# Altium PCB dAir-aster-0.0.0.1.PcbDoc
Units mm, origin at the board's own origin, x right, y up, seen from the top; angles counter-clockwise.
Board outline 94 x 94 mm, 2 copper layers (Top Layer, Bottom Layer); 83 components, 48 nets, 315 pads, 5 vias.
Unrouted connection lines stored in the file: 182.
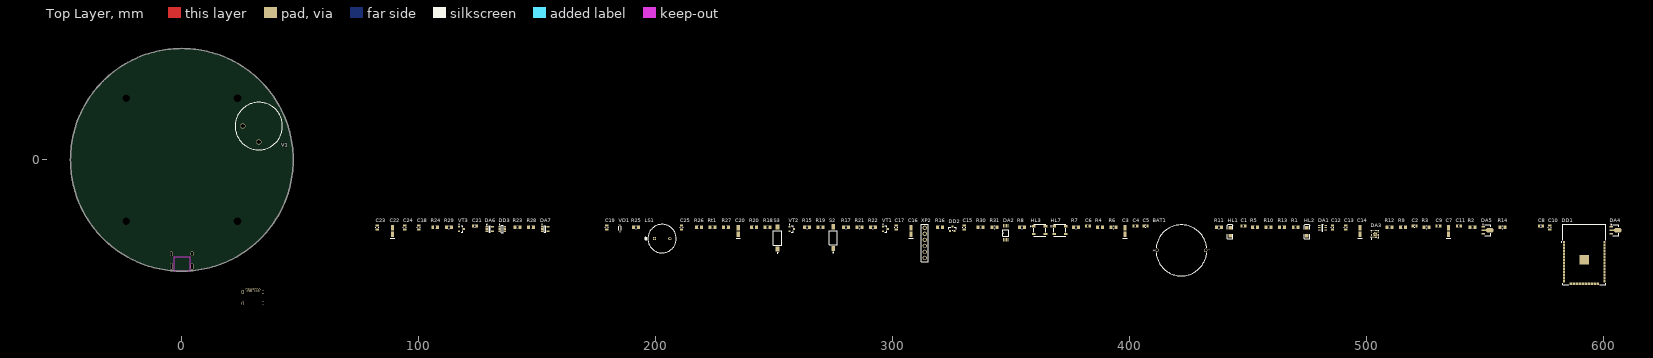
[diagram p0: Top Layer view]
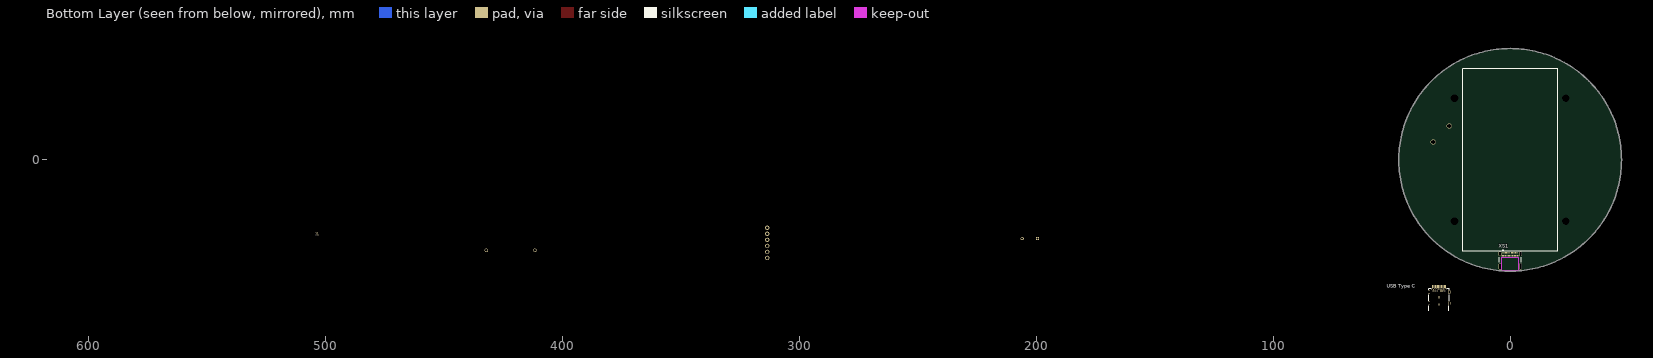
[diagram p1: Bottom Layer view, seen from below]

## Layer stack, top to bottom
Top Solder: solder mask 0.0102, Solder Resist, Dk 3.5
Top Layer: signal copper 0.0356
Dielectric 1: dielectric 0.32, FR-4, Dk 4.8
Bottom Layer: signal copper 0.0356
Bottom Solder: solder mask 0.0102, Solder Resist, Dk 3.5

## Board outline
-47,0 ccw(c0,0) 0,-47 ccw(c0,0) 47,0 ccw(c0,0) 0,47 ccw(c0,0)

## Design rules (kind name [scope] priority, off if disabled: settings)
Clearance [All] p1: gap=0.254 ignorepadtopadclearanceinfootprint=FALSE except(0: Arc-Hole Track-Hole SMDPad-Hole THPad-Hole Via-Hole Fill-Hole Poly-Hole Region-Hole Text-Hole)
PolygonConnect [All] p1: connectstyle=Relief reliefconductorwidth=0.254 reliefentries=4 polygonreliefangle="90 Angle" airgapwidth=0.254
RoutingVias [All] p1: holewidth=0.711 width=1.27 viastyle="Through Hole" minholewidth=0.711 minwidth=1.27 maxholewidth=0.711 maxwidth=1.27
SolderMaskExpansion [All] p1: expansion=0.102
Width [All] p1: maxlimit=0.254 minlimit=0.254 preferedwidth=0.254
30 further rules are at their usual default settings.

## Components (designator, comment, footprint, x,y, rotation, side; value= is the part's Value field where it differs from the comment)
BAT1 "3.7V" PANA-CR-2032HFN 421.93,-38.217 r0 top
C1 "100nF" CAPC0805(2012)155_L 448.092,-27.93 r0 top value=4.7uF
C2 "100nF" CAPC0805(2012)155_L 520.355,-27.93 r0 top value=4.7uF
C3 "47uF" KEMT-A-3216-18-2_M 398.181,-30.089 r90 top
C4 "4.7uF" CAPC0805(2012)155_L 402.499,-27.93 r0 top
C5 "1uF" CAPC0805(2012)155_L 406.817,-27.93 r0 top value=4.7uF
C6 "4.7uF" CAPC0805(2012)155_L 382.433,-27.93 r0 top
C7 "47uF" KEMT-A-3216-18-2_M 534.706,-30.089 r90 top
C8 "1uF" CAPC0805(2012)155_L 573.695,-27.93 r0 top value=4.7uF
C9 "1uF" CAPC0805(2012)155_L 530.388,-27.93 r0 top value=4.7uF
C10 "1uF" CAPC0805(2012)155_L 577.378,-28.565 r90 top value=4.7uF
C11 "1uF" CAPC0805(2012)155_L 539.024,-27.93 r0 top value=4.7uF
C12 "1nF" CAPC0805(2012)155_L 485.684,-28.565 r90 top value=4.7uF
C13 "0.1uF" CAPC0805(2012)155_L 491.272,-28.565 r90 top value=4.7uF
C14 "100uF" KEMT-A-3216-18-2_M 497.368,-30.089 r90 top
C15 "0.1uF" CAPC0805(2012)155_L 330.236,-28.565 r90 top value=4.7uF
C16 "0.1uF" KEMT-A-3216-18-2_M 307.757,-30.089 r90 top
C17 "0.1uF" CAPC0805(2012)155_L 301.534,-28.565 r90 top value=4.7uF
C18 "0.1uF" CAPC0805(2012)155_L 99.985,-28.565 r90 top value=4.7uF
C19 "1uF" CAPC0805(2012)155_L 179.36,-28.565 r90 top value=4.7uF
C20 "47uF" KEMT-A-3216-18-2_M 234.859,-30.089 r90 top
C21 "0.1uF" CAPC0805(2012)155_L 123.734,-27.93 r0 top value=4.7uF
C22 "10uF" KEMT-A-3216-18-2_M 88.936,-30.089 r90 top
C23 "0.1uF" CAPC0805(2012)155_L 82.459,-28.565 r90 top value=4.7uF
C24 "100 nF" CAPC0805(2012)155_L 94.143,-28.565 r90 top value=4.7uF
C25 "1mF" CAPC0805(2012)155_L 210.983,-28.565 r90 top value=4.7uF
DA1 "dw01v" dw01v 480.096,-27.676 r0 top
DA2 "fs8205" FS8205-TSSOP-8 346.873,-33.772 r90 top
DA3 "BQ24075" RGT0016C_V 503.591,-31.232 r90 top
DA4 "HT7530" SOT89_N 605.318,-29.708 r0 top
DA5 "HT7530" SOT89_N 551.216,-29.708 r0 top
DA6 "AD8603AUJ-REEL" ADI-UJ-5_M 129.957,-29.2 r0 top
DA7 "AD8603AUJ-REEL" ADI-UJ-5_M 153.325,-29.2 r0 top
DD1 "ESP-WROOM-32" OLMX-ESP-WROOM-32 591.983,-43.551 r0 top
DD2 "MAX809(SOT23)" FP-318-08-MFG 325.283,-29.073 r90 top
DD3 "MCP3421A2T-E/CH" SOT-23-CH6_L 135.291,-29.2 r0 top
HL1 "LED2" 3.2X1.6X1.1 442.504,-30.343 r90 top
HL2 "LED2" 3.2X1.6X1.1 474.889,-30.343 r90 top
HL3 "WS2812B" ADAI-WS2812B_V 362.113,-29.708 r0 top
HL7 "WS2812B" ADAI-WS2812B_V 370.622,-29.708 r0 top
LS1 "KPI1410(temporally)" CZCY-CY-12085G-5042-2_V 202.728,-33.264 r0 top
R1 "300" RESC0805(2012)_M 470.19,-28.438 r0 top value="4.30 Ohm"
R2 "5.1k" RESC0805(2012)_M 544.866,-28.438 r0 top value="4.30 Ohm"
R3 "56k" RESC0805(2012)_M 525.435,-28.438 r0 top value="4.30 Ohm"
R4 "1k" RESC0805(2012)_M 387.513,-28.438 r0 top value="4.30 Ohm"
R5 "1k" RESC0805(2012)_M 452.918,-28.438 r0 top value="4.30 Ohm"
R6 "1k" RESC0805(2012)_M 393.228,-28.438 r0 top value="4.30 Ohm"
R7 "1k" RESC0805(2012)_M 377.48,-28.438 r0 top value="4.30 Ohm"
R8 "1k" RESC0805(2012)_M 354.62,-28.438 r0 top value="4.30 Ohm"
R9 "0" RESC0805(2012)_M 515.402,-28.438 r0 top value="4.30 Ohm"
R10 "1k" RESC0805(2012)_M 458.76,-28.438 r0 top value="4.30 Ohm"
R11 "1k" RESC0805(2012)_M 437.805,-28.438 r0 top value="4.30 Ohm"
R12 "470k" RESC0805(2012)_M 509.687,-28.438 r0 top value="4.30 Ohm"
R13 "100k" RESC0805(2012)_M 464.475,-28.438 r0 top value="4.30 Ohm"
R14 "470" RESC0805(2012)_M 557.439,-28.438 r0 top value="4.30 Ohm"
R15 "10k" RESC0805(2012)_M 263.942,-28.438 r0 top value="4.30 Ohm"
R16 "10k" RESC0805(2012)_M 319.949,-28.438 r0 top value="4.30 Ohm"
R17 "10k" RESC0805(2012)_M 280.325,-28.438 r0 top value="4.30 Ohm"
R18 "10k" RESC0805(2012)_M 247.305,-28.438 r0 top value="4.30 Ohm"
R19 "470" RESC0805(2012)_M 269.657,-28.438 r0 top value="4.30 Ohm"
R20 "470" RESC0805(2012)_M 241.463,-28.438 r0 top value="4.30 Ohm"
R21 "47k" RESC0805(2012)_M 286.04,-28.438 r0 top value="4.30 Ohm"
R22 "47k" RESC0805(2012)_M 291.755,-28.438 r0 top value="4.30 Ohm"
R23 "1M" RESC0805(2012)_M 141.641,-28.438 r0 top value="4.30 Ohm"
R24 "150k" RESC0805(2012)_M 106.97,-28.438 r0 top value="4.30 Ohm"
R25 "200" RESC0805(2012)_M 191.679,-28.438 r0 top value="4.30 Ohm"
R26 "120k" RESC0805(2012)_M 218.222,-28.438 r0 top value="4.30 Ohm"
R27 "100k" RESC0805(2012)_M 229.779,-28.438 r0 top value="4.30 Ohm"
R28 "100" RESC0805(2012)_M 147.483,-28.438 r0 top value="4.30 Ohm"
R29 "470" RESC0805(2012)_M 112.812,-28.438 r0 top value="4.30 Ohm"
R30 "47k" RESC0805(2012)_M 337.221,-28.438 r0 top value="4.30 Ohm"
R31 "47k" RESC0805(2012)_M 343.063,-28.438 r0 top value="4.30 Ohm"
Rt1 "47k" RESC0805(2012)_M 224.064,-28.438 r0 top value="4.30 Ohm"
S2 "FSMSMTR" TECO-FSMSMTR_V 274.991,-32.883 r90 top
S3 "FSMSMTR" TECO-FSMSMTR_V 251.5,-33 r90 top
"USB Type C" "Comment" 632723300011 30,-59.35 r180 bottom
V1 "ME2 CO" "ME2 CO" 32.5,14.25 r0 top
VD1 "LL4148" INF-SOD323_V 184.948,-28.946 r0 top
VT1 "bc847" ONSC-SOT-23-3-318-08_V 296.962,-29.2 r0 top
VT2 "bc847" ONSC-SOT-23-3-318-08_V 257.465,-29.2 r0 top
VT3 "" ONSC-SOT-23-3-318-08_V 118.019,-29.2 r0 top
XP2 "bme680" BME280 313.599,-28.692 r0 top
XS1 "1054500101" FP-1054500101-MFG 0,-43 r180 bottom

## Footprints (in the part's own frame and the unit in brackets; to place one, negate y for a bottom-side part, rotate by r counter-clockwise, add the part's x,y. Pads: shape width x height; smd on the part's side, far side on the other; paste and mask are expansions set on the pad)
3.2X1.6X1.1 [mm] "SMT LED; 2 Flat Leads"
  rect 1.5x1.5 smd: 1(-1.75,0) 2(1.75,0)
  silkscreen extent -2.9,-1.15 3.2,1.15
632723300011 [mm] "USB 3.1 Type C Receptacle Horizontal THR"
  rect 0.3x1.2 smd: A1(-2.75,5.93) A2(-2.25,5.93) A3(-1.75,5.93) A4(-1.25,5.93) A5(-0.75,5.93) A6(-0.25,5.93) A7(0.25,5.93) A8(0.75,5.93) A9(1.25,5.93) A10(1.75,5.93) A11(2.25,5.93) A12(2.75,5.93)
  round 0.65 hole 0.4: B1(2.8,4.68) B2(2.4,3.98) B3(1.6,3.98) B4(1.2,4.68) B5(0.8,3.98) B6(0.4,4.68) B7(-0.4,4.68) B8(-0.8,3.98) B9(-1.2,4.68) B10(-1.6,3.98) B11(-2.4,3.98) B12(-2.8,4.68) G1(2,4.68) G2(-2,4.68)
  oval 1x1.6 hole 0.6 slot 1.2 at 90 deg: Shell(-4.27,-1.2) Shell(-4.27,3.53) Shell(4.27,-1.2) Shell(4.27,3.53)
  rect 0.2x1 smd: Shell(0,-1.75) Shell(0,1.35)
  silkscreen extent -4.37,-4.45 4.34,5, body extent -4.37,-5.6 4.37,6.19, height 3.05
ADAI-WS2812B_V [mm] "SMD, 4-Leads, Body 5x5mm, Pitch 3.3mm"
  rect 1.5x0.9 smd: 1(-2.45,1.65) 2(-2.45,-1.65) 3(2.45,-1.65) 4(2.45,1.65)
  silkscreen extent -3.87,-2.5 2.5,2.5, body extent -2.7,-2.5 2.7,2.5, height 1.69
ADI-UJ-5_M [mm] "SOT23, 5-Leads, Body 2.9x1.6mm, Pitch 0.95mm, IPC Low Density"
  rect 1.15x0.7 smd: 1(-1.225,0.95) 2(-1.225,0) 3(-1.225,-0.95) 4(1.225,-0.95) 5(1.225,0.95)
  silkscreen extent -1.35,-1.45 0.25,1.97, body extent -0.8,-1.45 0.8,1.45, height 1
BME280 [mm]
  round 1.8 hole 1.2: 1(0,0) 2(0,-2.54) 3(0,-5.08) 4(0,-7.62) 5(0,-10.16) 6(0,-12.7)
  silkscreen extent -1.5,-14.25 1.5,1.5
CAPC0805(2012)155_L [mm] "Chip Capacitor, Body 2.0x1.2mm, Height 1.55mm, IPC High Density"
  rect 0.95x1.35 smd: 1(-0.8,0) 2(0.8,0)
  silkscreen extent -0.05,-0.58 0.05,0.58, body extent -1.1,-0.72 1.1,0.72, height 1.55
CZCY-CY-12085G-5042-2_V [mm] "Through-hole Buzzer, 2-Leads, Dia 12mm, Height 8.5mm"
  rect 1.35x1.35 hole 0.85: 1(-3.25,0)
  round 1.35 hole 0.85: 2(3.25,0)
  Mechanical 13 keep-out circle w0.1: c0,0 r6
  silkscreen extent -7.41,-6 6,6, body extent -6,-6 6,6, height 8.5
dw01v [mm]
  rect 1x0.5 smd: 1(0,0)
  oval 1x0.5 smd: 2(0,-0.95) 3(0,-1.9) 4(2.8,-1.9) 5(2.8,-0.95) 6(2.8,0)
  silkscreen extent 1.16,-2.38 1.64,0.48
FP-318-08-MFG [mm]
  rect 0.9x0.8 smd paste+0 mask+0: 1(-1,0.95) 2(-1,-0.95) 3(1,0)
  silkscreen extent -0.7,-1.52 0.7,1.52, body extent -1.55,-1.62 1.55,1.62, height 0.25
FP-1054500101-MFG [mm]
  rrect100% 1.1x2.1 hole 1.6 slot 0.6 at 0 deg paste-1000 mask+0: 1(-4.32,3.36) 2(4.32,3.36)
  rrect100% 1.1x2.6 hole 2.1 slot 0.6 at 0 deg paste-1000 mask+0: 3(-4.32,-2) 4(4.32,-2)
  rect 0.3x0.7 smd paste+0 mask+0: A1(-3,3.77) A2(-2.5,3.77) A3(-2,3.77) A4(-1.5,3.77) A5(-1,3.77) A6(-0.5,3.77) A7(0.5,3.77) A8(1,3.77) A9(1.5,3.77) A10(2,3.77) A11(2.5,3.77) A12(3,3.77) B2(2.25,2.47) B3(1.75,2.47) B4(1.25,2.47) B5(0.75,2.47) B6(0.25,2.47) B7(-0.25,2.47) B8(-0.75,2.47) B9(-1.25,2.47) B10(-1.75,2.47) B11(-2.25,2.47)
  rect 1x0.7 smd paste+0 mask+0: B1(3.1,2.47) B12(-3.1,2.47)
  Keep-Out Layer region: -3.5,1.88 3.5,1.88 3.5,-3.77 -3.5,-3.77
  silkscreen extent -4.57,-0.3 4.57,5.03
FS8205-TSSOP-8 [mm]
  rect 1.45x0.45 smd: 1(0,0)
  oval 1.45x0.45 smd: 2(0,-0.65) 3(0,-1.3) 4(0,-1.95) 5(5.9,-1.95) 6(5.9,-1.3) 7(5.9,-0.65) 8(5.9,0)
  silkscreen extent 1.56,-2.28 4.34,0.33
INF-SOD323_V [mm] "SOD, 2-Leads, Body 1.7x1.25 mm"
  rect 0.6x0.8 smd: 1(0,1.25) 2(0,-1.25)
  silkscreen extent -0.76,-0.85 0.6,1.83, body extent -0.63,-0.85 0.63,0.85, height 1.1
KEMT-A-3216-18-2_M [mm] "Molded TAN Capacitor, 2-Leads, Body 3.4x1.8mm, IPC Low Density"
  rect 2.35x1.35 smd: 1(-1.325,0) 2(1.325,0)
  silkscreen extent -3,-0.9 -3,0.9, body extent -1.7,-0.9 1.7,0.9, height 1.8
"ME2 CO" [mm]
  round 2.2 hole 1.8: 1(-6.75,0) 2(0,-6.75)
  silkscreen extent -10,-10 10,10
OLMX-ESP-WROOM-32 [mm] "SMD, 38-Leads, Body 18x25.5mm, Pitch 1.27mm"
  rect 0.95x1 smd: 1(-8.575,8.78) 2(-8.575,7.51) 3(-8.575,6.24) 4(-8.575,4.97) 5(-8.575,3.7) 6(-8.575,2.43) 7(-8.575,1.16) 8(-8.575,-0.11) 9(-8.575,-1.38) 10(-8.575,-2.65) 11(-8.575,-3.92) 12(-8.575,-5.19) 13(-8.575,-6.46) 14(-8.575,-7.73) 17(-3.175,-8.78) 25(8.575,-7.73) 26(8.575,-6.46) 27(8.575,-5.19) 28(8.575,-3.92) 29(8.575,-2.65) 30(8.575,-1.38) 31(8.575,-0.11) 32(8.575,1.16) 33(8.575,2.43) 34(8.575,3.7) 35(8.575,4.97) 36(8.575,6.24) 37(8.575,7.51) 38(8.575,8.78)
  rect 4x4 smd: 1(0,1.395)
  rect 1x0.95 smd: 15(-5.715,-8.78) 16(-4.445,-8.78) 18(-1.905,-8.78) 19(-0.635,-8.78) 20(0.635,-8.78) 21(1.905,-8.78) 22(3.175,-8.78) 23(4.445,-8.78) 24(5.715,-8.78)
  silkscreen extent -9.72,-9.23 9,16.27, body extent -9.04,-9.25 9.04,16.29, height 3.04
ONSC-SOT-23-3-318-08_V [mm] "SOT23, 3-Leads, Body 2.92x1.3mm, Pitch 0.95mm"
  rect 0.9x0.8 smd: 1(-1,0.95) 2(-1,-0.95) 3(1,0)
  silkscreen extent -1.12,-1.46 0.65,2.02, body extent -0.65,-1.46 0.65,1.46, height 1.11
PANA-CR-2032HFN [mm] "TH, 2-Leads, Dia 21.5mm"
  round 1.45 hole 1.1: 1(-10.25,0) 2(10.25,0)
  silkscreen extent -10.7,-10.75 10.7,10.75, body extent -10.75,-10.75 10.75,10.75, height 9.9
RESC0805(2012)_M [mm] "Chip Resistor, Body 2.0x1.3mm, IPC Low Density"
  rect 1.25x1.5 smd: 1(-1.05,0) 2(1.05,0)
  silkscreen extent -0.05,-0.65 0.05,0.65, body extent -1.1,-0.67 1.1,0.67, height 0.7
RGT0016C_V [mm] "QFN, 16-Leads, Body 3x3mm, Pitch 0.5mm, Thermal Pad 1.65x1.65mm"
  rrect40% 0.6x0.25 smd: 1(-1.4,0.75) 2(-1.4,0.25) 3(-1.4,-0.25) 4(-1.4,-0.75) 9(1.4,-0.75) 10(1.4,-0.25) 11(1.4,0.25) 12(1.4,0.75)
  rrect40% 0.25x0.6 smd: 5(-0.75,-1.4) 6(-0.25,-1.4) 7(0.25,-1.4) 8(0.75,-1.4) 13(0.75,1.4) 14(0.25,1.4) 15(-0.25,1.4) 16(-0.75,1.4)
  rrect6% 1.55x1.55 on Top Paste: 17(0,0)
  rrect6% 1.7x1.7 smd paste-0.85: 17(0,0)
  silkscreen extent -2.35,-1.57 1.57,1.58, body extent -1.5,-1.5 1.5,1.5, height 1
SOT89_N [mm] "SOT89, 3-Leads, Body 4.5x2.4 mm, Pitch 1.5mm, Lead Span 4.1mm, IPC Medium Density"
  rect 1.4x0.6 smd: 1(-1.9,1.5) 3(-1.9,-1.5)
  rect 1.8x0.6 smd: 2(-1.7,0)
  oct 3.2x1.9 smd: 2(0.8,0)
  silkscreen extent -2.07,-2.3 1.3,2.47, body extent -1.3,-2.3 1.29,2.3, height 1.6
SOT-23-CH6_L [mm] "SOT23, 6-Leads, Body 2.9x1.7mm, Pitch 0.95mm, Lead Span 2.8mm, IPC High Density"
  rect 0.9x0.65 smd: 1(-1.2,0.95) 2(-1.2,0) 3(-1.2,-0.95) 4(1.2,-0.95) 5(1.2,0) 6(1.2,0.95)
  silkscreen extent -1.32,-1.55 0.35,1.95, body extent -0.9,-1.55 0.9,1.55, height 1.45
TECO-FSMSMTR_V [mm] "SMD, 2-Leads, Body 6x3.5mm, Pitch 9.19mm"
  rect 2.2x1.6 smd: 1(-4.595,0)
  rect 2.18x1.6 smd: 2(4.595,0)
  silkscreen extent -6.37,-1.75 3,1.75, body extent -4.98,-1.75 4.98,1.75, height 4.4

## Part data
BAT1: library part CMP-2000-05296-1, "Coin Cell Battery, 225 mAh, 0.2 mA, 3 V, -30 to 60 degC, Bulk", Battery Capacity=220mAh, Battery Voltage=3V, Manufacturer=Panasonic, Battery IEC Code=CR2032, Battery NEDA Code=5004LC, Battery Size Code=2032, Battery Technology=LithiumManganeseDioxide, Battery Terminals=PCBPins, Datasheet URL=https://datasheet.ciiva.com/3/aaa4000de87-3072.pdf, Datasheet Version="Rev. 0, 05/2010", External Depth=-, External Diameter=20mm, External Height=3.2mm, External Width=-, Manufacturer URL=http://www.panasonic.com/, Product Range=-, SVHC=1,2-dimethoxyethane,ethyleneglycoldimethylether(EGDME)(15-Jun-2015), Weight=2.9g
C1 C2 C4 C5 C6 C8 C9 C10 C11 C12 C13 C15 C17 C18 C19 C21 C23: library part CMP-1036-04882-1, "CAP 4.7uF 10V ±10% 0805 (2012 Metric) Thickness 1.55mm SMD", Case-EIA=0805, Case-Metric=2012, Rated Voltage="10 V", Tolerance=A±10%, Max Thickness="1.55 mm", Technology=SMT
C3 C7 C14 C16 C20 C22: library part CMP-2000-05172-1, Capacitance=10µF, ESR (Equivalent Series Resistance)=3.8Ohm, Lifetime @ Temp.=2000Hrs@85degC, Manufacturer=Kemet, Manufacturer Size Code=A, Operating Temperature=-55degC~125degC, Package / Case=1206(3216Metric), Package Description="2-Pin Surface Mount Device, Body 3.2 x 1.6 mm", Package Reference=1206, Standard Package=2,000, Tolerance=±10%, Voltage - Rated=10V, Catalog Drawings=T49x,T5xxSeries_A-side1T49x,T5xxSeries_A,B-side2T49x,T5xxSeries_A,SBottom, Category=Capacitors, Datasheet URL=http://www.farnell.com/datasheets/1824869.pdf, Datasheet Version=Apr-14, Family=TantalumCapacitors, Features=GeneralPurpose, Height - Seated (Max)="0.071\"(1.80mm)", Lead Spacing=-, Manufacturer URL=http://www.kemet.com/, Mounting Type=SurfaceMount, Online Catalog=T491Series, Other Names=399-3684-2, Packaging=Tape&Reel(TR), Product Training Modules=CapacitorBasics-TypicalUsesforCapacitorsDeratingGuidelinesforSurfaceMountTantalumCapacitors, Series=T491, Size / Dimension="0.126\"Lx0.063\"W(3.20mmx1.60mm)", Type=Molded
C24 C25: library part CMP-1036-04882-1, "CAP 4.7uF 10V ±10% 0805 (2012  Thickness 1.55mm SMD", Case-EIA=0805, Case-Metric=2012, Rated Voltage="10 V", Tolerance=A±10%, Max Thickness="1.55 mm", Technology=SMT
DA3: library part CMP-0321-00238-2, "USB-Friendly Li-Ion Battery Charger and Power-Path Management IC, Vout 5.5 V, 4.3 V, -40 to 85 degC, 16-pin QFN (RGT), Green (RoHS & no Sb/Br)", Manufacturer="Texas Instruments", Over Voltage Protection=N, PartNumber=BQ24075RGTR, Code_JEDEC=MO-220, ComponentLink1Description=Datasheet, ComponentLink1URL=http://www.ti.com/general/docs/lit/getliterature.tsp?genericPartNumber=BQ24075&fileType=pdf, DatasheetVersion=SLUS810G, Eco-Plan="Green (RoHS & no Sb/Br)", Lead Acid=N, Li-Ion=N, Li-Polymer=N, Mounting Technology="Surface Mount", NiCd=N, NiMH=N, PackageDescription="16-Pin Plastic Quad Flat No-Lead, 3 x 3 mm Body, 0.5 mm Pitch, 1.7 x 1.7 mm Exposed Pad", PackageReference=RGT0016C, PackageVersion="revH, Oct-2011", SubFamily="Battery Charge Management", Vin(Min)(V)=4.3
DA4 DA5: library part CMP-0204-00106-1, "100mA Low Power LDO, Output Voltage 3.0V, SOT89 Pkg", Code_IPC=SOT89, DatasheetVersion="Rev1.80, Mar-2010", PackageDescription="3-Pin SOT-89 Package 1.5 mm Pitch, 4.1 mm Lead Span", PackageReference=SOT89, PackageVersion=May-2010
DA6 DA7: library part CMP-0384-02070-2, "Single Channel Single-Supply Operation Operational Amplifier, 400 KHz BW, 100 mV/us SR, Industrial, 5-pin SOT23 (UJ-5), Reel", Amplifiers Per Package=1, Generic Part Number=AD8603, Input Bias Current=200fA, Input Offset Voltage=12uV, Manufacturer="Analog Devices", Code_JEDEC=MO-193-AB, ComponentLink1Description="Manufacturer URL", ComponentLink1URL=http://www.analog.com/en/index.html, ComponentLink2Description=Datasheet, ComponentLink2URL=http://www.analog.com/static/imported-files/data_sheets/AD8603_8607_8609.pdf, ComponentLink3Description="Package Specification", ComponentLink3URL=http:/www.analog.com/static/imported-files/packages/PKG_PDF/TSOT(UJ)/UJ_5.pdf, ComponentLink4Description="Reference Circuit", ComponentLink4URL=http://www.analog.com/en/all-operational-amplifiers-op-amps/operational-amplifiers-op-amps/ad8603/products/product.html#product-recommendations, DatasheetVersion="Rev. C", Iq/Amp=50uA, Mounting Technology="Surface Mount", PackageDescription="5-Pin Thin Small Outline Transistor Package, Body 2.9 x 1.6 mm, Pitch 0.95 mm", PackageReference=UJ-5, PackageVersion=100708-A, PartNumber=AD8603AUJ-REEL, RevisionNote="Reference Circuit URL fixed", Slew Rate=100mV/us, Small Signal Bandwidth=400KHz, V Span Max=6V, V Span Min=1.8V
DD1: library part CMP-2000-07454-1, "Espressif System, 2.7 to 3.6 V, -40 to 85 degC, 38-Pin SMD", Manufacturer=Olimex, Package Description="38-Pin Surface Mount Device, Body 18 x 25.5 mm, Pitch 1.27 mm", Datasheet URL=http://www.espressif.com/sites/default/files/documentation/esp-wroom-32_datasheet_en.pdf, Datasheet Version="Rev. 2.1, 09/2017", Manufacturer URL=https://www.olimex.com, Mounting Technology=SurfaceMount, Package Reference=ESP-WROOM-32, RoHSCompliant=false
DD2: library part CMP-07130-000007-1, "IC MPU SUPERVISORY 2.93V SOT23", Manufacturer="ON SEMICONDUCTOR", Manufacturer Part Number=MAX809STRG, Max Junction Temp=+125°C, Max Supply Voltage=5.5V, Min Supply Voltage=1V, Nominal Supply Current=0.5-0.8uA, Output Current=20mA, Output Voltage=0.3V, Package=318-08, Temperature="-40°C to +125°C", Temperature Range Low=-40°C, Threshold Voltage=2.93V, Automotive=No, Category=IC, ComponentLink2Description=Datasheet, ComponentLink2URL=https://www.onsemi.cn/PowerSolutions/document/MAX809S-D.PDF, Device Class L1="Integrated Circuits (ICs)", Device Class L2="Power Management ICs", Device Class L3="Voltage Supervisors", Digikey Description="IC MPU SUPERVISORY 2.93V SOT23", Footprint Url=https://www.onsemi.com/pub/Collateral/318-08.PDF, Height=1.11mm, Lead Free=Yes, Mouser Description="Supervisory Circuits 2.93V uP Reset", Number Of Outputs=1, Number Of Rails Monitored=1, Octopart=https://octopart.com/max809strg-on+semiconductor-509853, Reset Timeout=10us, Reset Type="Active Low", RoHS=TRUE, Standoff Height=0.01mm, Temperature Range High=+125°C
DD3: library part CMP-0188-00097-2, "18-Bit Analog-to-Digital Converter with I2C Interface and On-Board Reference, 6-Pin SOT-23, Extended Temperature, Tape and Reel", Code_IPC=SOT26A-6, ComponentLink1Description="Manufacturer URL", ComponentLink1URL=http://www.microchip.com/, ComponentLink2Description=Datasheet, ComponentLink2URL=http://ww1.microchip.com/downloads/en/DeviceDoc/22003e.pdf, ComponentLink3Description="Package Specification", ComponentLink3URL=http://www.microchip.com/stellent/groups/techpub_sg/documents/packagingspec/en012702.pdf, DatasheetVersion="revE, Aug-2009", PackageDescription="6-Lead Plastic Small Outline Transistor (CH) [SOT-23]", PackageReference=SOT-23-CH6, PackageVersion="revBB, Aug-2009", RevisionNote="URLs added."
HL1 HL2: "Typical RED, GREEN, YELLOW, AMBER GaAs LED", LatestRevisionDate=17-Jul-2002, LatestRevisionNote="Re-released for DXP Platform.", PackageDescription="SM LED; 2 Flat Leads", PackageReference=3.2X1.6X1.1, PackageVersion=Feb-2002, Published=8-Jun-2000, Publisher="Altium Limited"
HL3 HL7: library part CMP-1740-00005-1, "Intelligent Control LED Integrated Light Source, 3.5 to 5.3 V, -25 to 80 degC, 4-Pin SMD, RoHS, Bulk", Case\Package=Radial, Current Rating="240 mA", Max Operating Temperature="125 degC", Min Operating Temperature="-55 degC", Package Quantity=200, Tolerance=10%, ComponentLink1Description="Manufacturer URL", ComponentLink1URL=https://www.adafruit.com/, ComponentLink2Description=Datasheet, ComponentLink2URL=https://cdn-shop.adafruit.com/datasheets/WS2812B.pdf, DatasheetVersion=May-13, Height="12.2 mm", Lead Pitch="5 mm", Length="12.2 mm", Mount="Through Hole", PackageDescription="4-Pin Surface Mount Device, Body 5 x 5 mm, Pitch 3.3 mm", PackageReference=WS2812B, Packaging=Bulk, Pins=2, Radiation Hardening=No, REACH SVHC="No SVHC", RoHSCompliant=true, Shielding=Unshielded
LS1: library part CMP-1019-00001-1, "Buzzer, 5 V, 42 Ohm, -20 to 70 degC, 2-Pin THD, Dia 12 mm, Height 8.5 mm, RoHS, Tray", Current Consumption (Max.)="35 mA", Manufacturer="Changzhou Chaoyin", Operating Temperature Range="-20 to 70 degC", Oscillation Frequency="2.048 KHz", PartNumber=cy-12085G-5042, Rated Voltage="5 V", Resistance Value="42 +/- 4 Ohm", Mounting Technology="Through Hole", PackageDescription="2-Pin Through-hole Buzzer, Dia 12 mm, Height 8.5 mm", PackageReference=CY-12085G-5042, Packing=Tray, RoHS=TRUE, Sound Pressure Level (Min.)="85 dB"
R1 R2 R3 R4 R5 R6 R7 R8 R9 R10 R11 R12 R13 R14 R15 R16 R17 R18 R19 R20 R21 R22 R23 R24 R25 R26 R27 R28 R29 R30 R31 Rt1: library part CMP-1013-00017-1, Case-EIA=0805, Case-Metric=2012, Power="0.125 W", Tolerance="5 %", Technology=SMT
S2 S3: library part CMP-2000-07501-1, "FSMSM Push Button Switch, 50 mA, -35 to 85 degC, 2-Pin SMD, RoHS, Tape and Reel", Case\/Package=SMD/SMT, Contact Current Rating=50mA, Contact Resistance=100mOhm, Manufacturer="TE Connectivity", Max Operating Temperature=85degC, Max Voltage Rating (DC)=12V, Min Operating Temperature=-35degC, Operating Force=180gf, Package Description="2-Pin Surface Mount Device, Body 6 x 3.5 mm, Pitch 9.19 mm", Package Quantity=1800, Voltage Rating (DC)=24V, Actuator Length=1.07mm, Actuator Material=Polyamide, Contact Material=Brass, Contact Plating=Silver, Current Rating=50mA, Datasheet URL=http://www.te.com/commerce/DocumentDelivery/DDEController?Action=showdoc&DocId=Customer+Drawing%7F1437566-3%7FC2%7Fpdf%7FEnglish%7FENG_CD_1437566-3_C2_1437566_3_1_c.dwg.pdf%7F1437566-4, Datasheet Version="Rev. C2, 08/2014", Electrical Life=20000Cycles, ELV=Compliant, Illumination Type=Illuminated, Lead Free=LeadFree, Manufacturer URL=http://www.te.com/, Mechanical Life=20000Cycles, Mount=SurfaceMount, Mounting Technology=SurfaceMount, Orientation=Straight, Package Reference=FSMSMTR, Packaging=TapeandReel, REACH SVHC=Unknown, RoHSCompliant=true, Switch Travel=0.25mm, Termination=GullWing, Throw Configuration=SPST
VD1: library part CMP-1182-00006-1, "Silicon Schottky Diode, SOD323, Reel, Green", Manufacturer=Infineon, PartNumber="BAT 54-03W E6327", ComponentLink1Description="Manufacturer URL", ComponentLink1URL=http://www.infineon.com/, ComponentLink2Description=Datasheet, ComponentLink2URL=http://www.infineon.com/dgdl/bat54series.pdf?folderId=db3a30431400ef68011425f1ca2505e3&fileId=db3a304314dca3890115190b74210ea6, ComponentLink3Description="Package Specification", ComponentLink3URL=http://www.infineon.com/dgdl/SOD323-Package_Overview.pdf?folderId=db3a30431936bc4b011952aab84f3bbe&fileId=db3a30431936bc4b011952beed653be3, Green=TRUE, Mounting Technology="Surface Mount", PackageDescription="2-Pin Small Outline Diode Package, 1.25 x 1.7 mm Body", PackageReference=SOD323, Packing=Reel, RevisionNote="Lost Devices pt2"
VT1 VT2 VT3: library part CMP-1048-00737-1, "General Purpose Transistor, NPN Silicon, 3-Pin SOT-23, Pb-Free, Tape and Reel", Manufacturer="On Semiconductor", PartNumber=BC817-25LT1G, ComponentLink1Description="Manufacturer URL", ComponentLink1URL=http://www.onsemi.com/, ComponentLink2Description=Datasheet, ComponentLink2URL=http://www.onsemi.com/pub_link/Collateral/BC817-16LT1-D.PDF, ComponentLink3Description="Package Specification", ComponentLink3URL=http://www.onsemi.cn/pub_link/Collateral/318-08.PDF, DatasheetVersion="Rev. 12", fT Min (MHz)=100, IC Continuous (A)=0.5, Mounting Technology="Surface Mount", PackageDescription="3-Pin Small Outline Transistor, Body 2.92 x 1.3 mm, Pitch 0.95 mm", PackageReference=SOT-23-3-318-08, PackageVersion="Rev. AP, 11/2009", Packing="Tape and Reel", Polarity=NPN, RoHS=TRUE
XP2: library part bme280
XS1: library part CMP-04767-000004-1, "CONN RCP USB3.1 TYPEC 24P SMD RA", Current Rating=0.25/1.25/5A, Manufacturer=Molex, Package=0, Temperature="-30°C to +85°C", Temperature Range High=+85°C, Temperature Range Low=-30°C, Voltage Rating=30V, Automotive=No, Category=Conn, ComponentLink2Description=Datasheet, ComponentLink2URL=https://www.molex.com/webdocs/datasheets/pdf/en-us/1054500101_IO_CONNECTORS.pdf, Conn Orientation="Right Angle", Contact Material=Gold,Nickel, Device Class L1=Connectors, Device Class L2="USB Connectors", Device Class L3=unset, Digikey Description="CONN RCP USB3.1 TYPEC 24P SMD RA", Footprint Url=https://www.molex.com/pdm_docs/sd/1054500101_sd.pdf, Height=3.44mm, Is Female=yes, Lead Free=Yes, Manufacturer Part Number=1054500101, Mouser Description="USB Shielded I/O Receptacle; Type C; Right Angle; Surface Mount; Gold over Nickel", Number Of Contacts=24, Octopart=https://octopart.com/105450-0101-molex-68082325, Pitch=0.5mm, RoHS=TRUE, Shielding=true, Usb Standard="USB 3.1"

## Free pads (board coordinates)
  round 0 hole 3.2: 1(-23.5,-26) 2(23.5,-26) 3(23.5,26) 4(-23.5,26)

## Via types
v1: diameter 0.5, hole 0.3, Top Layer to Bottom Layer, 5 vias

## Nets (pads, with @x,y where several pads share a name; then routed paths per layer and width w, separated by ;. In a path a pad name is that pad's centre, name@x,y a point inside that pad or via, vN(x,y) a via of type N, cw(c..) or ccw(c..) an arc to the next point about the centre after c; other vN are vias at no path point)
3V: C10.2 C17.2 C19.1 C22.1 C23.2 DA4.3 DA6.5 DA7.5 DD3.5 R23.2 XP2.1
5V: C2.1 C5.1 DA3.13 R3.2 R5.1 R9.2 XS1.A4 XS1.A9
+E: C6.1 C7.1 C8.2 C9.2 C15.2 C25.1 DA3.5 DA3.10 DA3.11 DA4.2 DA5.2 HL3.1 HL7.1 LS1.1 R9.1 R10.1 R11.1 R13.2 VD1.1
GND: C2.2 C3.2 C4.2 C5.2 C6.2 C7.2 C8.1 C9.1 C10.1 C11.1 C12.1 C13.1 C14.2 C15.1 C16.2 C17.1 C18.1 C19.2 C21.2 C22.2 C23.1 C24.2 C25.2 DA2.6 DA2.7 DA3.4 DA3.6 DA3.8 DA3.14 DA3.15 DA3.17@503.591,-31.232 DA4.1 DA5.1 DA6.2 DA7.2 DD1.1 DD1.15 DD1.38 DD2.1 DD3.2 DD3.6 HL3.3 HL7.3 R2.2 R4.2 R6.2 R7.2 R8.2 R12.1 R19.1 R20.1 R24.1 VT3.2 XP2.2 XS1.A1 XS1.A12
  other v1: 503.091,-31.732 504.091,-31.732 503.591,-31.232 503.091,-30.732 504.091,-30.732
NetBAT1_1: BAT1.1 C3.1 C4.1 DA3.2 DA3.3 R1.1
NetBAT1_2: BAT1.2 C1.2 DA1.6 DA2.2 DA2.3
NetC1_1: C1.1 DA1.5 R1.2
NetC16_1: C16.1 DD1.3 R16.2 VT1.3
NetC18_2: C18.2 DA6.3 R23.1 R24.2
NetC20_1: C20.1 DA7.1 R27.2 R28.1 Rt1.2
NetC20_2: C20.2 DA7.4 R25.2 R26.1 V1.1
NetC21_1: C21.1 DD3.1 R28.2
NetC24_1: C24.1 R29.1 VT3.1
NetDA1_1: DA1.1 DA2.4
NetDA1_2: DA1.2 R4.1
NetDA1_3: DA1.3 DA2.5
NetDA2_1: DA2.1 DA2.8
NetDA3_1: DA3.1 R5.2 R6.1
NetDA3_7: DA3.7 DD1.8 HL1.2 R30.2
NetDA3_9: DA3.9 DD1.6 HL2.2 R31.2
NetDA3_12: DA3.12 R7.1
NetDA3_16: DA3.16 R8.1
NetDA6_1: DA6.1 DA6.4 DA7.3 R25.1 V1.2
NetDD1_7: DD1.7 R12.2 R13.1
NetDD1_9: DD1.9 R21.1 S3.2
NetDD1_12: DD1.12 R22.1 S2.2
NetDD1_25: DD1.25 R15.1 VT2.3
NetDD1_26: DD1.26 R14.2
NetDD1_27: DD1.27 R29.2
NetDD1_33: DD1.33 DD3.4 XP2.4
NetDD1_34: DD1.34
NetDD1_35: DD1.35
NetDD1_36: DD1.36 DD3.3 XP2.3
NetDD2_2: DD2.2 R15.2 R16.1
NetHL1_1: HL1.1 R11.2
NetHL2_1: HL2.1 R10.2
NetHL3_2: HL3.2 HL7.4
NetHL3_4: HL3.4 R14.1
NetLS1_2: LS1.2 VD1.2 VT3.3
NetR2_1: R2.1 R3.1 XS1.A5
NetR17_1: R17.1 VT1.1
NetR17_2: R17.2 VT2.2
NetR18_1: R18.1 VT2.1
NetR18_2: R18.2 VT1.2
NetR19_2: R19.2 S2.1
NetR20_2: R20.2 S3.1
NetR26_2: R26.2 R27.1 Rt1.1
"V ESP": C11.2 C12.2 C13.2 C14.1 DA5.3 DD1.2 DD2.3 R21.2 R22.2 R30.1 R31.1
pads on no net: "USB Type C.A1" "USB Type C.A2" "USB Type C.A3" "USB Type C.A4" "USB Type C.A5" "USB Type C.A6" "USB Type C.A7" "USB Type C.A8" "USB Type C.A9" "USB Type C.A10" "USB Type C.A11" "USB Type C.A12" "USB Type C.B1" "USB Type C.B2" "USB Type C.B3" "USB Type C.B4" "USB Type C.B5" "USB Type C.B6" "USB Type C.B7" "USB Type C.B8" "USB Type C.B9" "USB Type C.B10" "USB Type C.B11" "USB Type C.B12" "USB Type C.G1" "USB Type C.G2" "USB Type C.Shell" DA1.4 DA3.17@503.591,-31.232 DD1.4 DD1.5 DD1.10 DD1.11 DD1.13 DD1.14 DD1.16 DD1.17 DD1.18 DD1.19 DD1.20 DD1.21 DD1.22 DD1.23 DD1.24 DD1.28 DD1.29 DD1.30 DD1.31 DD1.32 DD1.37 HL7.2 XP2.5 XP2.6 XS1.1 XS1.2 XS1.3 XS1.4 XS1.A2 XS1.A3 XS1.A6 XS1.A7 XS1.A8 XS1.A10 XS1.A11 XS1.B1 XS1.B2 XS1.B3 XS1.B4 XS1.B5 XS1.B6 XS1.B7 XS1.B8 XS1.B9 XS1.B10 XS1.B11 XS1.B12

## Silkscreen, mask and mechanical layers (free items; w line width, h text height)
Bottom Overlay:
  lines w0.254: -20,-38.5 -20,38.5 20,38.5 20,-38.5 -20,-38.5
Mechanical 1:
  circle w0.254: c35,0 r3.5
  circle w0.254: c24.5,0 r3
  circle w0.254: c-35,0 r3.5
  circle w0.254: c-24.5,0 r3
  circle w0.254: c-23.5,26 r3.5
  circle w0.254: c23.5,26 r3.5
  circle w0.254: c23.5,-26 r3.5
  circle w0.254: c-23.5,-26 r3.5
  circle w0.254: c0,0 r50
  circle w1: c0,0 r47

## Text inside footprints (layer, text, board x,y; h text height)
BAT1: Mechanical 5 "-" at 433.383,-38.667 h1.02; Mechanical 5 "+" at 409.8,-38.717 h1.02; Top Overlay "-" at 433.383,-38.667 h1.02; Top Overlay "+" at 409.8,-38.717 h1.02
"USB Type C": Mechanical 2 "PCB Edge" at 31.7,-64.95 h0.61